# EAGLE board resistance_measuring_board (EAGLE 9.6.2)
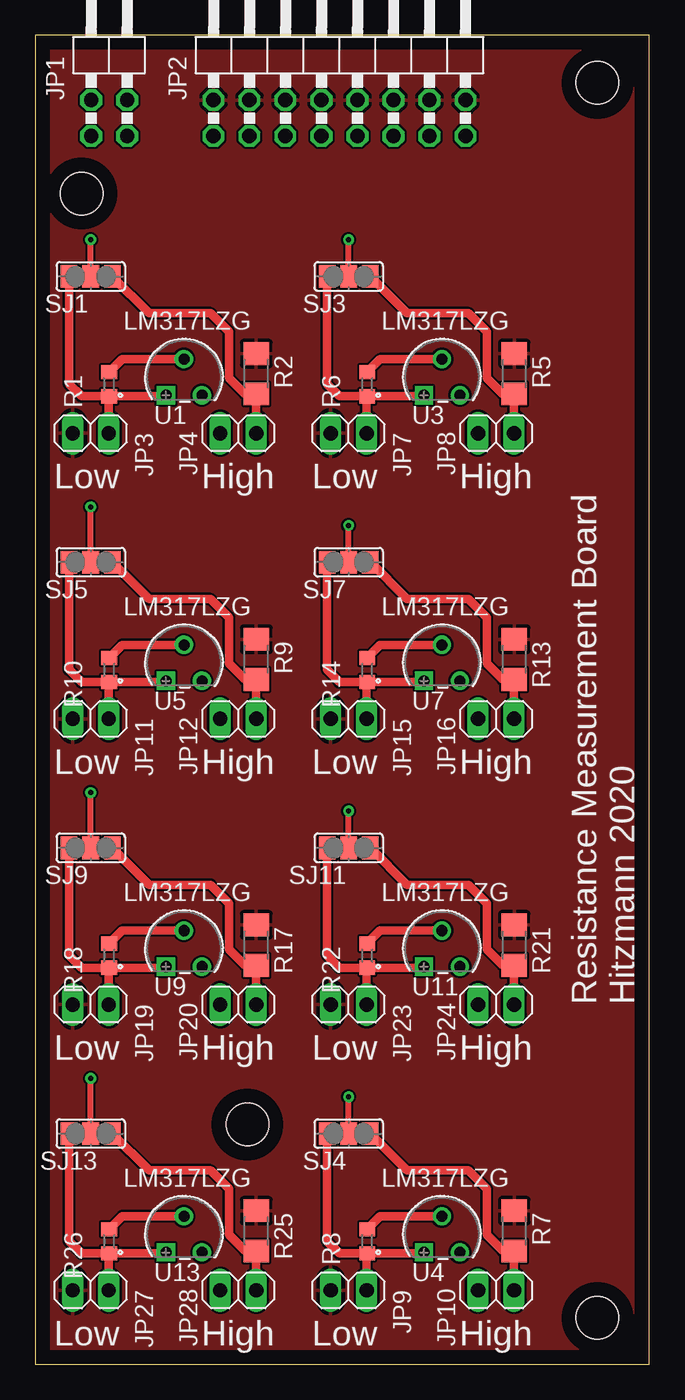
[diagram p0: board, top side]
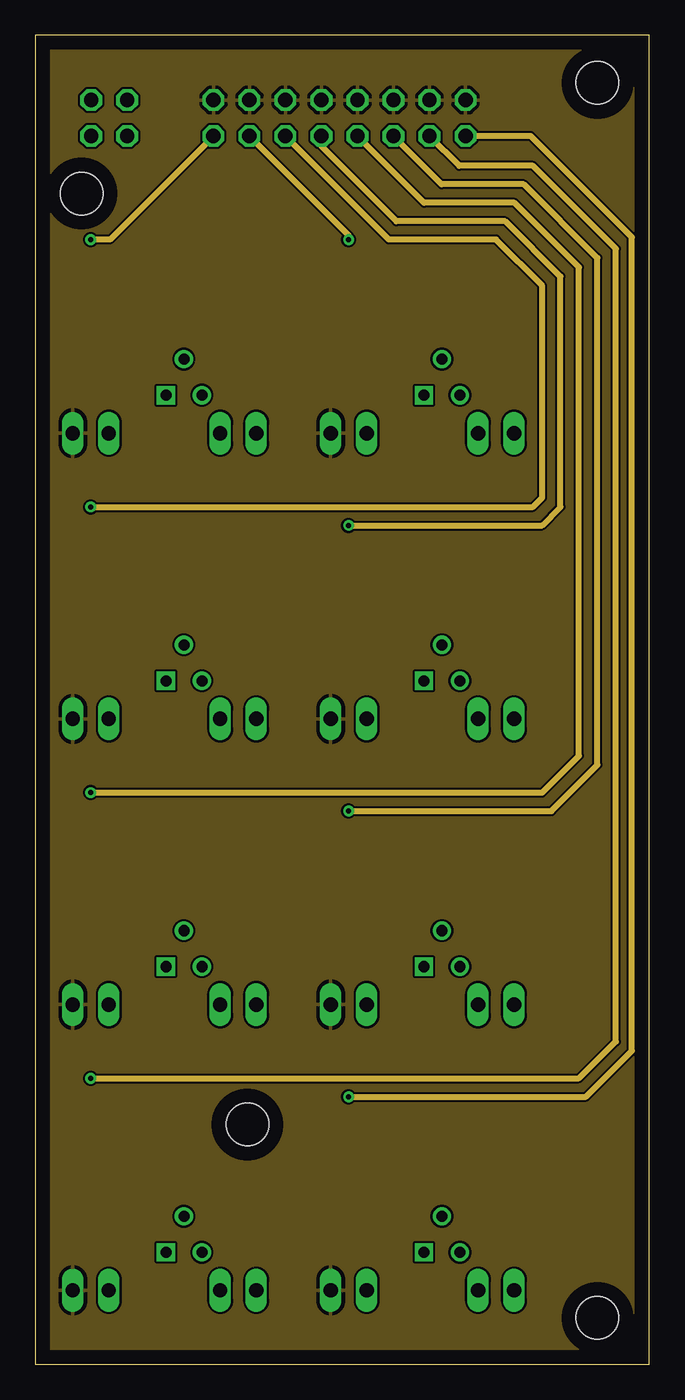
[diagram p1: board, inner layer Route2]
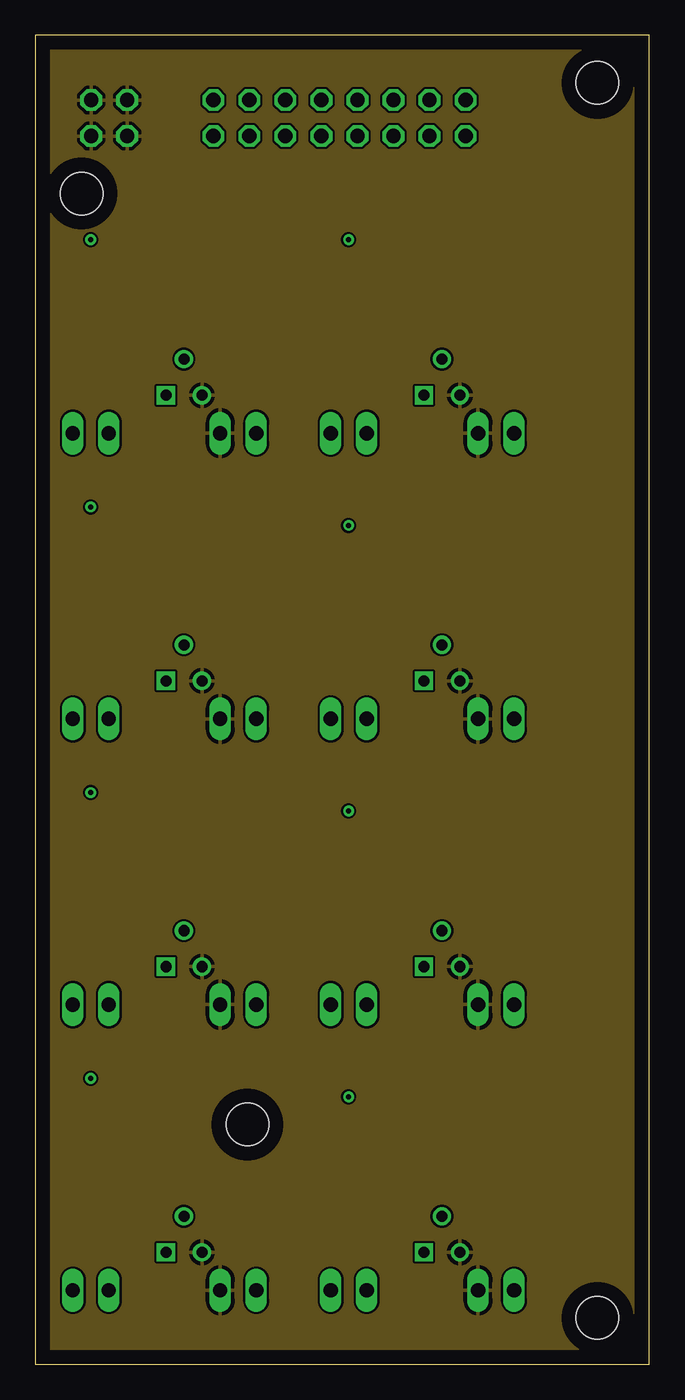
[diagram p2: board, inner layer Route15]
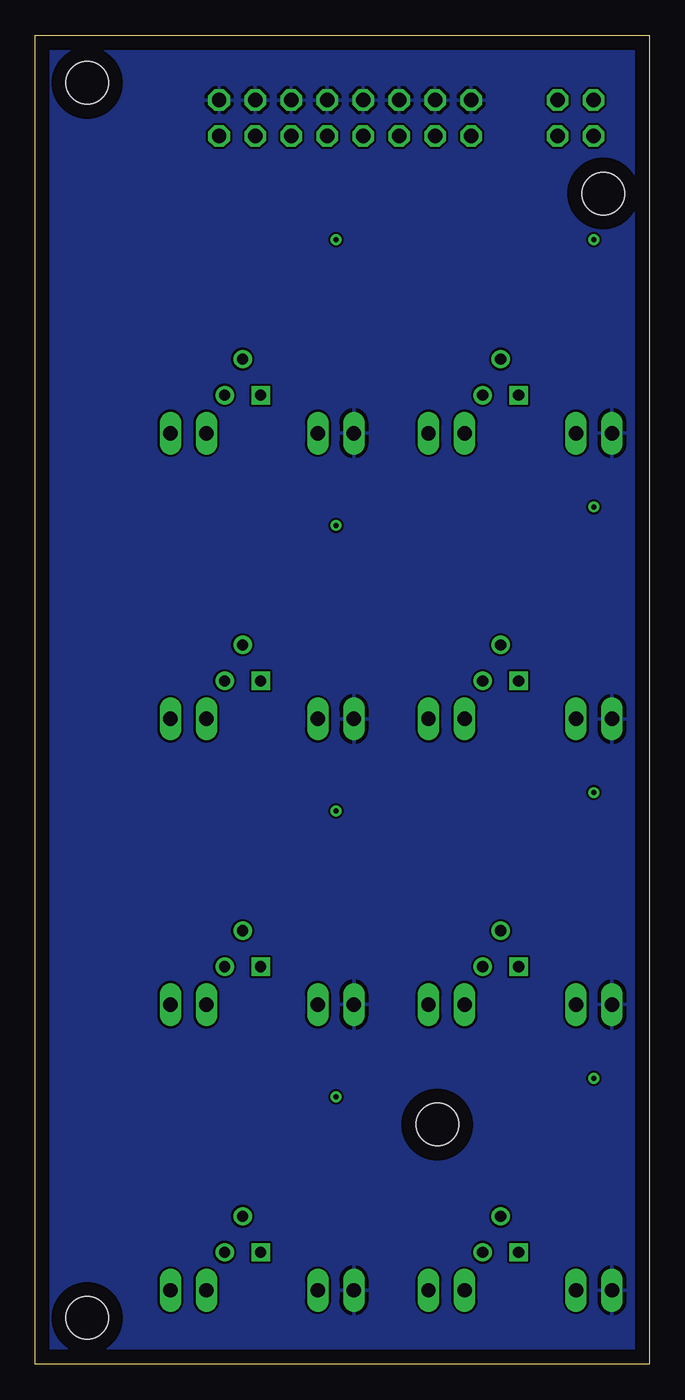
[diagram p3: board, bottom side, seen from below]

Size 43.3 x 93.7 mm. Coordinates in mm from the lower left corner, seen from the top.
Outline: 0,0 43.3,0 43.3,93.7 0,93.7 0,0
Copper layers (1+2*15+16): Top 0.035mm / dielectric 1.5mm / Route2 0.035mm / dielectric 0.15mm / Route15 0.035mm / dielectric 0.2mm / Bottom 0.035mm
Design rules "default *": minimum track width 6mil, minimum drill 0.35mm, track to track 6mil, track to pad 6mil, pad to pad 6mil, via to via 6mil, smd to smd 6mil, copper to edge 40mil, drill to drill 6mil, minimum pad ring 10mil, minimum via ring 8mil, stop-mask expansion 4mil, vias tented up to drill 0mil, thermal gap 10mil
Holes 3 mm at 39.65,90.35 3.25,82.55 39.65,3.25 14.95,16.9

## Footprints (pad centres in the part's own frame; a part is rotated, then mirrored left to right if it is on the bottom)
2X02/90 = drill 1.016 octagon: 1 -1.27,-6.35; 2 -1.27,-3.81; 3 1.27,-6.35; 4 1.27,-3.81
2X08/90 = drill 1.016 octagon: 1 -8.89,-6.35; 2 -8.89,-3.81; 3 -6.35,-6.35; 4 -6.35,-3.81; 5 -3.81,-6.35; 6 -3.81,-3.81; 7 -1.27,-6.35; 8 -1.27,-3.81; 9 1.27,-6.35; 10 1.27,-3.81; 11 3.81,-6.35; 12 3.81,-3.81; 13 6.35,-6.35; 14 6.35,-3.81; 15 8.89,-6.35; 16 8.89,-3.81
1X02 = drill 1.016 long: 1 -1.27,0; 2 1.27,0
R0603 = smd 1 x 1.1: 1 -0.85,0; 2 0.85,0
R1206 = smd 1.6 x 1.803: 1 -1.422,0; 2 1.422,0
SJ_2 = smd 1.168 x 1.6: 1 -1.524,0; 2 0,0; 3 1.524,0
TO-92_ONS = drill 0.787 pad 1.295 square: 1 0,0 | drill 0.787 pad 1.295: 2 1.27,2.54; 3 2.54,0

## Placement (x,y rotation side)
JP1  [2X02/90]  5.2,92.95 0 top
JP2  [2X08/90]  21.45,92.95 0 top
JP3  [1X02]  3.9,65.65 180 top
JP4  [1X02]  14.3,65.65 0 top
JP7  [1X02]  22.1,65.65 180 top
JP8  [1X02]  32.5,65.65 0 top
JP9  [1X02]  22.1,5.2 180 top
JP10  [1X02]  32.5,5.2 0 top
JP11  [1X02]  3.9,45.5 180 top
JP12  [1X02]  14.3,45.5 0 top
JP15  [1X02]  22.1,45.5 180 top
JP16  [1X02]  32.5,45.5 0 top
JP19  [1X02]  3.9,25.35 180 top
JP20  [1X02]  14.3,25.35 0 top
JP23  [1X02]  22.1,25.35 180 top
JP24  [1X02]  32.5,25.35 0 top
JP27  [1X02]  3.9,5.2 180 top
JP28  [1X02]  14.3,5.2 0 top
R1  12R, 0.1%  [R0603]  5.2,69.1 270 top
R2  1K, 0.1%  [R1206]  15.58,69.84 270 top
R5  1K, 0.1%  [R1206]  33.78,69.84 270 top
R6  12R, 0.1%  [R0603]  23.4,69.1 270 top
R7  1K, 0.1%  [R1206]  33.78,9.39 270 top
R8  12R, 0.1%  [R0603]  23.4,8.65 270 top
R9  1K, 0.1%  [R1206]  15.58,49.69 270 top
R10  12R, 0.1%  [R0603]  5.2,48.95 270 top
R13  1K, 0.1%  [R1206]  33.78,49.69 270 top
R14  12R, 0.1%  [R0603]  23.4,48.95 270 top
R17  1K, 0.1%  [R1206]  15.58,29.54 270 top
R18  12R, 0.1%  [R0603]  5.2,28.8 270 top
R21  1K, 0.1%  [R1206]  33.78,29.54 270 top
R22  12R, 0.1%  [R0603]  23.4,28.8 270 top
R25  1K, 0.1%  [R1206]  15.58,9.39 270 top
R26  12R, 0.1%  [R0603]  5.2,8.65 270 top
SJ1  [SJ_2]  3.9,76.7 180 top
SJ3  [SJ_2]  22.1,76.7 180 top
SJ4  [SJ_2]  22.1,16.25 180 top
SJ5  [SJ_2]  3.9,56.55 180 top
SJ7  [SJ_2]  22.1,56.55 180 top
SJ9  [SJ_2]  3.9,36.4 180 top
SJ11  [SJ_2]  22.1,36.4 180 top
SJ13  [SJ_2]  3.9,16.25 180 top
U1  LM317LZG  [TO-92_ONS]  9.21,68.33 0 top
U3  LM317LZG  [TO-92_ONS]  27.41,68.33 0 top
U4  LM317LZG  [TO-92_ONS]  27.41,7.88 0 top
U5  LM317LZG  [TO-92_ONS]  9.21,48.18 0 top
U7  LM317LZG  [TO-92_ONS]  27.41,48.18 0 top
U9  LM317LZG  [TO-92_ONS]  9.21,28.03 0 top
U11  LM317LZG  [TO-92_ONS]  27.41,28.03 0 top
U13  LM317LZG  [TO-92_ONS]  9.21,7.88 0 top

## Library data of the parts
JP1-JP4 JP7-JP12 JP15 JP16 JP19 JP20 JP23 JP24 JP27 JP28 = pinhead
R1 R2 R5-R10 R13 R14 R17 R18 R21 R22 R25 R26 = resistor
SJ1 SJ3-SJ5 SJ7 SJ9 SJ11 SJ13 = jumper
U1 U3-U5 U7 U9 U11 U13 = LM317LZG; BUILT_BY: EMA_UL_Team; MANUFACTURER_PART_NUMBER: LM317LZG; SOURCELIBRARY: ON_Semi_2010-01-01; VENDOR: ON Semiconductor

## Nets
GND: JP2.2 JP2.4 JP2.6 JP2.8 JP2.10 JP2.12 JP2.14 JP2.16 JP3.2 JP7.2 JP9.2 JP11.2 JP15.2 JP19.2 JP23.2 JP27.2 R2.1 R5.1 R7.1 R9.1 R13.1 R17.1 R21.1 R25.1
N$2: R6.1 U3.2
N$3: R8.1 U4.2
N$4: R10.1 U5.2
N$6: R14.1 U7.2
N$8: R18.1 U9.2
N$10: R22.1 U11.2
N$12: R26.1 U13.2
N$13: R1.1 U1.2
SENSE_1: JP2.1 SJ1.2
SENSE_2: JP2.3 SJ3.2
SENSE_3: JP2.5 SJ5.2
SENSE_4: JP2.7 SJ7.2
SENSE_5: JP2.9 SJ9.2
SENSE_6: JP2.11 SJ11.2
SENSE_7: JP2.13 SJ13.2
SENSE_8: JP2.15 SJ4.2
SENSE_HI_1: JP4.2 R2.2 SJ1.1
SENSE_HI_2: JP8.2 R5.2 SJ3.1
SENSE_HI_3: JP12.2 R9.2 SJ5.1
SENSE_HI_4: JP16.2 R13.2 SJ7.1
SENSE_HI_5: JP20.2 R17.2 SJ9.1
SENSE_HI_6: JP24.2 R21.2 SJ11.1
SENSE_HI_7: JP28.2 R25.2 SJ13.1
SENSE_HI_8: JP10.2 R7.2 SJ4.1
SENSE_LO_1: JP3.1 R1.2 SJ1.3 U1.1
SENSE_LO_2: JP7.1 R6.2 SJ3.3 U3.1
SENSE_LO_3: JP11.1 R10.2 SJ5.3 U5.1
SENSE_LO_4: JP15.1 R14.2 SJ7.3 U7.1
SENSE_LO_5: JP19.1 R18.2 SJ9.3 U9.1
SENSE_LO_6: JP23.1 R22.2 SJ11.3 U11.1
SENSE_LO_7: JP27.1 R26.2 SJ13.3 U13.1
SENSE_LO_8: JP9.1 R8.2 SJ4.3 U4.1
VCC: JP1.1 JP1.2 JP1.3 JP1.4 JP4.1 JP8.1 JP10.1 JP12.1 JP16.1 JP20.1 JP24.1 JP28.1 U1.3 U3.3 U4.3 U5.3 U7.3 U9.3 U11.3 U13.3

## Tracks (layer width: path | path; a pad name or v marks a point on that pad's centre or on a via)
GND
  pour Top: -1.3,-1.3 44.85,-1.3 44.85,94.9 -1.3,94.9
  pour Bottom: -2.6,-2.6 46.15,-2.6 46.15,96.2 -2.6,96.2
  pour Route2: -0.65,-0.65 43.85,-0.65 43.85,94.05 -0.65,94.05
N$2
  Top 0.61: U3.2 24.32,70.87 R6.1
N$3
  Top 0.61: U4.2 24.32,10.42 R8.1
N$4
  Top 0.61: U5.2 6.12,50.72 R10.1
N$6
  Top 0.61: U7.2 24.32,50.72 R14.1
N$8
  Top 0.61: U9.2 6.12,30.57 R18.1
N$10
  Top 0.61: U11.2 24.32,30.57 R22.1
N$12
  Top 0.61: U13.2 6.12,10.42 R26.1
N$13
  Top 0.61: U1.2 6.12,70.87 R1.1
SENSE_1  (via drill 0.35)
  Top 0.406: SJ1.2 v3.9,79.3
  Route2 0.406: JP2.1 5.26,79.3 v3.9,79.3
SENSE_2  (via drill 0.35)
  Top 0.406: SJ3.2 v22.1,79.3
  Route2 0.406: v22.1,79.3 22.1,79.6 JP2.3
SENSE_3  (via drill 0.35)
  Top 0.406: SJ5.2 v3.9,60.45
  Route2 0.406: v3.9,60.45 35.1,60.45 35.75,61.1 35.75,76.05 32.5,79.3 24.94,79.3 JP2.5
SENSE_4  (via drill 0.35)
  Top 0.406: SJ7.2 v22.1,59.15
  Route2 0.406: v22.1,59.15 35.75,59.15 37.05,60.45 37.05,76.7 33.15,80.6 25.47,80.6 20.18,85.89 JP2.7
SENSE_5  (via drill 0.35)
  Top 0.406: SJ9.2 v3.9,40.3
  Route2 0.406: v3.9,40.3 35.75,40.3 38.35,42.9 38.35,77.35 33.8,81.9 27.42,81.9 JP2.9
SENSE_6  (via drill 0.35)
  Top 0.406: SJ11.2 v22.1,39
  Route2 0.406: v22.1,39 36.4,39 39.65,42.25 39.65,78 34.45,83.2 28.66,83.2 JP2.11
SENSE_7  (via drill 0.35)
  Top 0.406: SJ13.2 v3.9,20.15
  Route2 0.406: v3.9,20.15 38.35,20.15 40.95,22.75 40.95,78.65 35.1,84.5 29.9,84.5 JP2.13
SENSE_8  (via drill 0.35)
  Top 0.406: SJ4.2 v22.1,18.85
  Route2 0.406: v22.1,18.85 38.83,18.85 42.08,22.1 42.08,79.47 34.95,86.6 JP2.15
SENSE_HI_1
  Top 0.61: JP4.2 R2.2 14.78,68.42 13.65,69.55 13.65,72.8 12.35,74.1 8.02,74.1 SJ1.1
SENSE_HI_2
  Top 0.61: JP8.2 R5.2 32.98,68.42 31.85,69.55 31.85,72.8 30.55,74.1 26.22,74.1 SJ3.1
SENSE_HI_3
  Top 0.61: JP12.2 R9.2 14.78,48.27 13.65,49.4 13.65,52.65 12.35,53.95 8.02,53.95 SJ5.1
SENSE_HI_4
  Top 0.61: JP16.2 R13.2 32.98,48.27 31.85,49.4 31.85,52.65 30.55,53.95 26.22,53.95 SJ7.1
SENSE_HI_5
  Top 0.61: JP20.2 R17.2 14.78,28.12 13.65,29.25 13.65,32.5 12.35,33.8 8.02,33.8 SJ9.1
SENSE_HI_6
  Top 0.61: JP24.2 R21.2 32.98,28.12 31.85,29.25 31.85,32.5 30.55,33.8 26.22,33.8 SJ11.1
SENSE_HI_7
  Top 0.61: JP28.2 15.57,7.96 R25.2 14.78,7.97 13.65,9.1 13.65,12.35 12.35,13.65 8.02,13.65 SJ13.1
SENSE_HI_8
  Top 0.61: JP10.2 33.77,7.96 R7.2 32.98,7.97 31.85,9.1 31.85,12.35 30.55,13.65 26.22,13.65 SJ4.1
SENSE_LO_1
  Top 0.61: R1.2 3.25,68.25 2.38,69.12 SJ1.3 | U1.1 9.13,68.25 R1.2 | JP3.1 5.17,68.22 R1.2
SENSE_LO_2
  Top 0.61: R6.2 21.45,68.25 20.58,69.12 SJ3.3 | U3.1 27.33,68.25 R6.2 | JP7.1 23.37,68.22 R6.2
SENSE_LO_3
  Top 0.61: R10.2 3.25,48.1 2.38,48.97 SJ5.3 | U5.1 9.13,48.1 R10.2 | JP11.1 5.17,48.07 R10.2
SENSE_LO_4
  Top 0.61: R14.2 21.45,48.1 20.58,48.97 SJ7.3 | U7.1 27.33,48.1 R14.2 | JP15.1 23.37,48.07 R14.2
SENSE_LO_5
  Top 0.61: R18.2 3.25,27.95 2.38,28.82 SJ9.3 | U9.1 9.13,27.95 R18.2 | JP19.1 5.17,27.92 R18.2
SENSE_LO_6
  Top 0.61: R22.2 21.45,27.95 20.58,28.82 SJ11.3 | U11.1 27.33,27.95 R22.2 | JP23.1 23.37,27.92 R22.2
SENSE_LO_7
  Top 0.61: R26.2 3.25,7.8 2.38,8.67 SJ13.3 | U13.1 9.13,7.8 R26.2 | JP27.1 5.17,7.77 R26.2
SENSE_LO_8
  Top 0.61: R8.2 21.45,7.8 20.58,8.67 SJ4.3 | U4.1 27.33,7.8 R8.2 | JP9.1 23.37,7.77 R8.2
VCC
  pour Route15: -1.95,-1.95 45.5,-1.95 45.5,95.55 -1.95,95.55

## Text on the board
tNames: Low | High | Low | High | Low | High | Low | High | Resistance Measurement Board / Hitzmann 2020 | Low | High | Low | High | Low | High | Low | High